# EAGLE board dfo_programmer_modified (EAGLE 9.4.2)
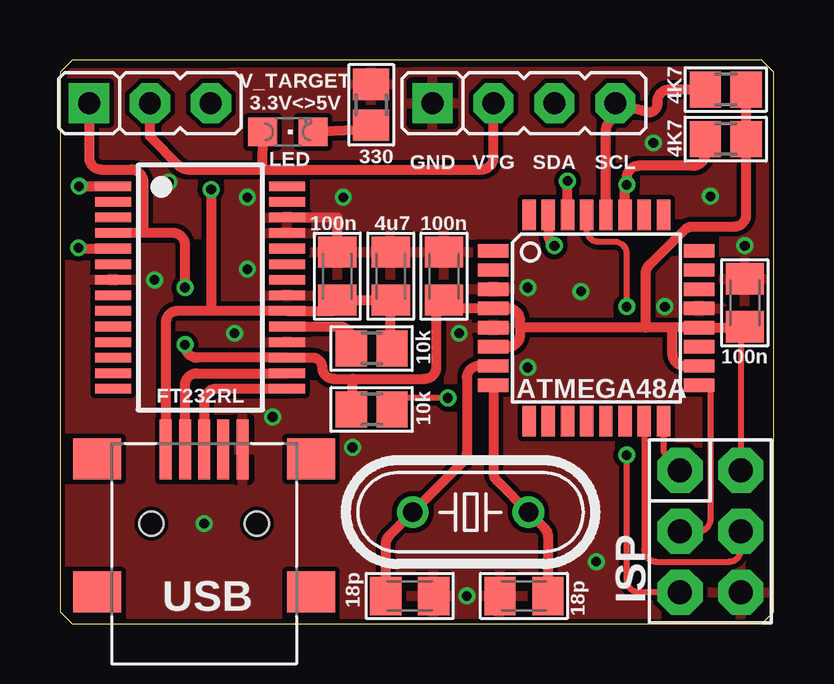
[diagram p0: board, top side]
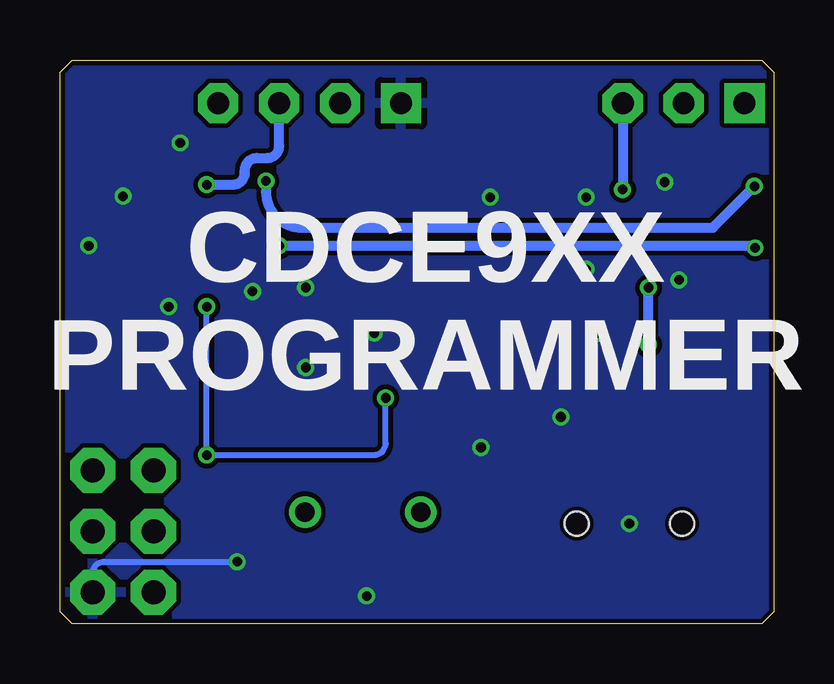
[diagram p1: board, bottom side, seen from below]

Size 29.75 x 23.5 mm. Coordinates in mm from the lower left corner, seen from the top.
Outline: 0,0.5 0.5,0 29.25,0 29.75,0.5 29.75,23 29.25,23.5 0.5,23.5 0,23 0,0.5
Copper layers (1*16): Top 0.035mm / dielectric 1.55mm / Bottom 0.035mm
Design rules "PCBCart *": minimum track width 0.2mm, minimum drill 0.4mm, track to track 0.2mm, track to pad 0.2mm, pad to pad 0.2mm, via to via 0.2mm, smd to smd 0mil, copper to edge 0.2mm, drill to drill 0.2mm, minimum pad ring 10mil, minimum via ring 6mil, stop-mask expansion 2mil, vias tented up to drill 30mil, thermal gap 10mil

## Footprints (pad centres in the part's own frame; a part is rotated, then mirrored left to right if it is on the bottom)
C0805K_B = smd 1.3 x 1.6: 1 -1,0; 2 1,0
JP2 = drill 0.914 pad 1.676 square: 1 -2.54,0 | drill 0.914 pad 1.676 octagon: 2 0,0; 3 2.54,0
SSOP28 = smd 0.4 x 1.5: 1 -4.225,-3.625; 2 -3.575,-3.625; 3 -2.925,-3.625; 4 -2.275,-3.625; 5 -1.625,-3.625; 6 -0.975,-3.625; 7 -0.325,-3.625; 8 0.325,-3.625; 9 0.975,-3.625; 10 1.625,-3.625; 11 2.275,-3.625; 12 2.925,-3.625; 13 3.575,-3.625; 14 4.225,-3.625; 15 4.225,3.625; 16 3.575,3.625; 17 2.925,3.625; 18 2.275,3.625; 19 1.625,3.625; 20 0.975,3.625; 21 0.325,3.625; 22 -0.325,3.625; 23 -0.975,3.625; 24 -1.625,3.625; 25 -2.275,3.625; 26 -2.925,3.625; 27 -3.575,3.625; 28 -4.225,3.625
TQFP32-08 = smd 1.27 x 0.559: 1 -4.293,2.8; 2 -4.293,2; 3 -4.293,1.2; 4 -4.293,0.4; 5 -4.293,-0.4; 6 -4.293,-1.2; 7 -4.293,-2; 8 -4.293,-2.8; 17 4.293,-2.8; 18 4.293,-2; 19 4.293,-1.2; 20 4.293,-0.4; 21 4.293,0.4; 22 4.293,1.2; 23 4.293,2; 24 4.293,2.8 | smd 0.559 x 1.27: 9 -2.8,-4.293; 10 -2,-4.293; 11 -1.2,-4.293; 12 -0.4,-4.293; 13 0.4,-4.293; 14 1.2,-4.293; 15 2,-4.293; 16 2.8,-4.293; 25 2.8,4.293; 26 2,4.293; 27 1.2,4.293; 28 0.4,4.293; 29 -0.4,4.293; 30 -1.2,4.293; 31 -2,4.293; 32 -2.8,4.293
JP3 = drill 0.914 pad 1.676 square: 1 -3.81,0 | drill 0.914 pad 1.676 octagon: 2 -1.27,0; 3 1.27,0; 4 3.81,0
CHIPLED_0805 = smd 1.2 x 1.2: A 0,-1.05; C 0,1.05
HC49/S = drill 0.813: 1 -2.413,0; 2 2.413,0
R0805_B = smd 1.3 x 1.5: 1 -0.85,0; 2 0.85,0
2X3_ISP_BIGPOGO = drill 1 pad 1.88 octagon: GND 2.54,1.27; MISO -2.54,-1.27; MOSI 0,1.27; RESET 2.54,-1.27; SCK 0,-1.27; VCC -2.54,1.27
LUM2486-01 = smd 0.5 x 2.5: 1VBUS -1.6,3.1; 2D- -0.8,3.1; 3D+ 0,3.1; 4ID 0.8,3.1; 5GND 1.6,3.1 | smd 2 x 1.7: P$1 -4.45,2.7; P$2 4.45,2.7; P$3 4.45,-2.85; P$4 -4.45,-2.85 | hole 1: 2.2,0; -2.2,0

## Placement (x,y rotation side)
C1  100n  [C0805K_B]  11.56,14.49 270 top
C2  4u7  [C0805K_B]  13.79,14.49 270 top
C3  18p  [C0805K_B]  14.58,1.15 180 top
C4  18p  [C0805K_B]  19.34,1.15 0 top
C5  100n  [C0805K_B]  16.01,14.49 270 top
C6  100n  [C0805K_B]  28.55,13.38 270 top
E$1  [JP2]  3.75,21.7 0 top
IC1  FT232RL  [SSOP28]  5.85,14.01 270 top
IC2  ATMEGA48A  [TQFP32-08]  22.36,12.74 0 top
JP1  [JP3]  19.34,21.7 0 top
LED  [CHIPLED_0805]  9.5,20.5 270 top
Q1  10M  [HC49/S]  17.12,4.64 180 top
R1  10k  [R0805_B]  12.99,8.93 0 top
R2  10k  [R0805_B]  12.99,11.47 0 top
R3  4K7  [R0805_B]  27.76,20.2 0 top
R4  4K7  [R0805_B]  27.76,22.27 0 top
R5  330  [R0805_B]  12.98,21.63 90 top
U$2  ISPBIG_POGO_PINS  [2X3_ISP_BIGPOGO]  27.12,3.85 270 top
USB1  LUMBERG2486_01_MINI_USB_B  [LUM2486-01]  6.01,4.17 0 top

## Library data of the parts
C1-C6 R1-R5 = resistor
E$1 JP1 = jumper
IC1 = ftdichip; MPN: FT232RL; OC_FARNELL: 1146032; OC_NEWARK: 91K9918
IC2 = atmel; MPN: ATMEGA8-16AU; OC_FARNELL: 9171371; OC_NEWARK: 73M8863
LED = led
Q1 = crystal; OC_FARNELL: 1667008; OC_NEWARK: unknown
U$2 USB1 = schnaustlib

## Nets
!RESET: IC2.29 R1.2 U$2.RESET
+3V3: C5.2 C6.2 E$1.1 IC1.4 IC1.17 IC2.4 IC2.6 IC2.18 IC2.20 R1.1 R3.2 R4.2 U$2.VCC
FT_RX: IC1.5 IC2.31
FT_TX: IC1.1 IC2.30
GND: C1.1 C2.1 C3.1 C4.1 C5.1 C6.1 IC1.7 IC1.18 IC1.21 IC1.25 IC1.26 IC2.3 IC2.5 IC2.21 JP1.1 R5.2 U$2.GND USB1.5GND
N$1: LED.C R5.1
N$3: C1.2 C2.2 E$1.3 IC1.20 R2.2 USB1.1VBUS
N$4: IC1.19 R2.1
N$7: C3.2 IC2.7 Q1.2
N$8: C4.2 IC2.8 Q1.1
N$9: IC2.16 U$2.MISO
N$14: IC2.17 U$2.SCK
N$15: IC2.15 U$2.MOSI
S$2: IC2.27 JP1.3 R3.1
SCL: IC2.28 JP1.4 R4.1
USB+: IC1.15 USB1.3D+
USB-: IC1.16 USB1.2D-
V_TARGET: E$1.2 JP1.2 LED.A

## Tracks (layer width: path | path; a pad name or v marks a point on that pad's centre or on a via)
!RESET  (via drill 0.4)
  Top 0.254: U$2.RESET 24.13,1.31 arc-90 23.63,1.81 v23.63,7.03 | v23.63,13.22 23.63,15.41 arc90 23.13,15.91 22.46,15.91 arc-90 21.96,16.41 IC2.29 | v16.17,9.41 13.84,9.41 R1.2
  Bottom 0.254: v23.63,13.22 v23.63,7.03 16.67,7.03 arc-90 16.17,7.53 v16.17,9.41
+3V3  (via drill 0.4)
  Top 0.254: 28.19,12.01 28.39,12.01 U$2.VCC
  Top 0.406: C6.2 arc-90 28.19,12.01 27.86,12.34 IC2.20 25.54,12.34 | 19.18,12.34 19.18,12.04 arc-90 18.68,11.54 IC2.6 | IC2.18 26.04,10.74 arc-90 25.54,11.24 25.54,12.34 | v5.21,11.63 5.21,11.59 arc90 5.71,11.09 IC1.17 10.54,11.09 arc-90 10.93,10.7 arc90 11.43,10.2 12.2,10.2 | v5.21,14.01 5.21,15.79 arc90 4.71,16.29 3.47,16.29 | 3.47,16.29 IC1.4 | 12.2,10.2 15.19,10.2 arc90 15.69,10.7 15.69,13.17 C5.2 16.36,13.14 IC2.4 18.68,13.14 arc-90 19.18,12.64 19.18,12.34 | R1.1 12.2,8.93 12.2,10.2 | 3.47,16.29 3.47,18.43 arc90 2.97,18.93 1.72,18.93 arc-90 1.22,19.43 1.22,20 1.21,20.01 E$1.1 | 24.42,12.34 19.18,12.34 | 25.54,12.34 24.42,12.34 | 24.42,12.34 24.42,14.6 arc-45 24.57,14.95 26.02,16.4 arc-45 26.38,16.55 28.11,16.55 arc90 28.61,17.05 R3.2 R4.2
  Bottom 0.406: v5.21,11.63 v5.21,14.01
FT_RX  (via drill 0.4)
  Top 0.406: v0.77,15.67 arc90 0.77,15.64 IC1.5 | IC2.31 20.36,16.22 arc45 20.51,15.86 v20.61,15.76
  Bottom 0.406: v20.61,15.76 v20.6,15.77 0.87,15.77 v0.77,15.67
FT_TX  (via drill 0.4)
  Top 0.406: v0.8,18.23 IC1.1 | IC2.30 v21.16,18.45
  Bottom 0.406: v21.16,18.45 21.16,18 arc-90 19.66,16.5 2.53,16.5 v0.8,18.23
GND  (via drill 0.4)
  Top 0.406: C1.1 11.56,16.93 IC1.26
  Bottom 0.254: U$2.GND 28.39,2.08 arc90 27.89,2.58 v22.36,2.58
  other vias: 7.28,12.11 3.95,14.33 8.87,8.61 6.01,4.17 25.22,13.22 16.96,1.15 19.5,14.01 21.73,13.85 16.64,12.11 12.2,7.34 7.81,14.77 4.54,18.41 19.5,10.68 28.55,15.76 27.12,17.82 24.74,20.04 7.81,17.77 11.81,17.77
  pour Top: -0.61,22.96 29.87,23.06 29.98,-1.23 -0.5,-1.23
  pour Bottom: -0.66,23.06 29.82,23.06 29.98,-1.23 -0.5,-1.23
N$1
  Top 0.406: R5.1 12.79,20.59 LED.C
N$3  (via drill 0.4)
  Top 0.406: 6.3,13.04 IC1.20 11.43,13.04 C1.2 C2.2 13.79,11.47 R2.2 | 6.3,13.04 4.91,13.04 arc90 4.41,12.54 USB1.1VBUS | v6.3,18.1 6.3,13.04
  Bottom 0.406: E$1.3 v6.29,18.11 v6.3,18.1
N$4
  Top 0.406: IC1.19 11.64,12.38 arc-90 12.14,11.88 R2.1
N$7
  Top 0.406: IC2.7 17.46,10.74 arc90 16.96,10.24 16.96,7.11 arc-45 16.82,6.75 Q1.2 13.73,3.66 arc45 13.58,3.31 C3.2
N$8
  Top 0.406: IC2.8 18.07,6.32 arc45 18.21,5.96 Q1.1 20.2,3.98 arc-45 20.34,3.63 C4.2
N$9
  Top 0.254: IC2.16 25.16,7.29 arc45 25.31,6.94 U$2.MISO
N$14
  Top 0.254: U$2.SCK 26.62,3.85 arc90 27.12,4.35 27.12,9.94 IC2.17
N$15
  Top 0.254: IC2.15 24.36,3.08 arc90 24.86,2.58 27.89,2.58 arc90 28.39,3.08 U$2.MOSI
S$2  (via drill 0.4)
  Top 0.406: R3.1 26.91,19.59 arc-90 26.41,19.09 24.13,19.09 arc90 23.63,18.59 v23.63,18.3 arc45 23.56,18.13 IC2.27
  Bottom 0.406: JP1.3 20.61,19.91 arc90 21.11,19.41 21.54,19.41 arc-90 22.04,18.91 22.04,18.8 arc90 22.54,18.3 v23.63,18.3
SCL
  Top 0.406: IC2.28 22.76,20.55 arc-45 22.91,20.91 22.91,21.11 JP1.4 24.56,21.31 arc90 24.9,21.65 24.9,21.77 arc-90 25.4,22.27 R4.1
USB+
  Top 0.406: IC1.15 6.51,9.79 arc90 6.01,9.29 USB1.3D+
USB-
  Top 0.406: USB1.2D- 5.21,9.94 arc-90 5.71,10.44 IC1.16
V_TARGET
  Top 0.406: 8.43,18.93 5.33,18.93 arc-45 4.98,19.08 3.75,20.3 E$1.2 | 8.43,18.93 17.57,18.93 arc90 18.07,19.43 JP1.2 | LED.A 8.43,18.93

## Text on the board
tPlace: V_TARGET / 3.3V<>5V | GND | VTG | SDA | SCL | ISP | USB
bPlace: CDCE9XX / PROGRAMMER